# Altium PCB STM32F103UART3.PcbDoc
Units mm, origin at the board's own origin, x right, y up, seen from the top; angles counter-clockwise.
Board outline 80 x 50 mm, 2 copper layers (Top Layer, Bottom Layer); 37 components, 51 nets, 188 pads, 36 vias.
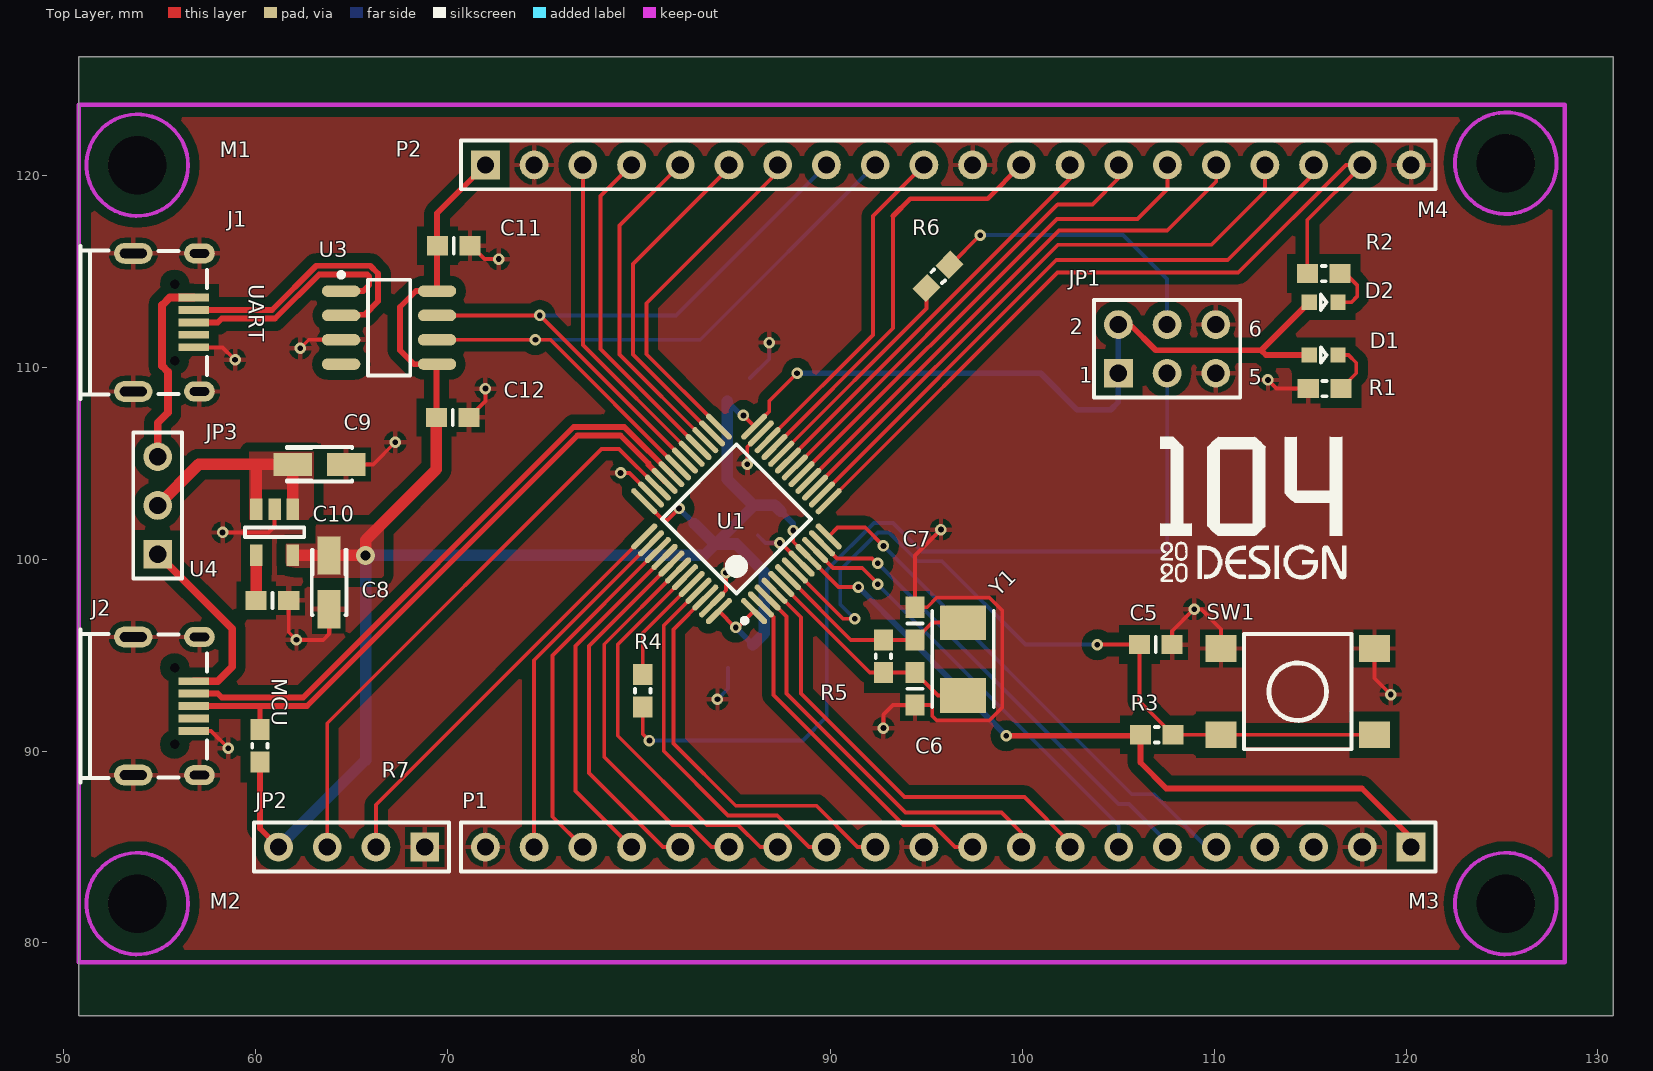
[diagram p0: Top Layer view]
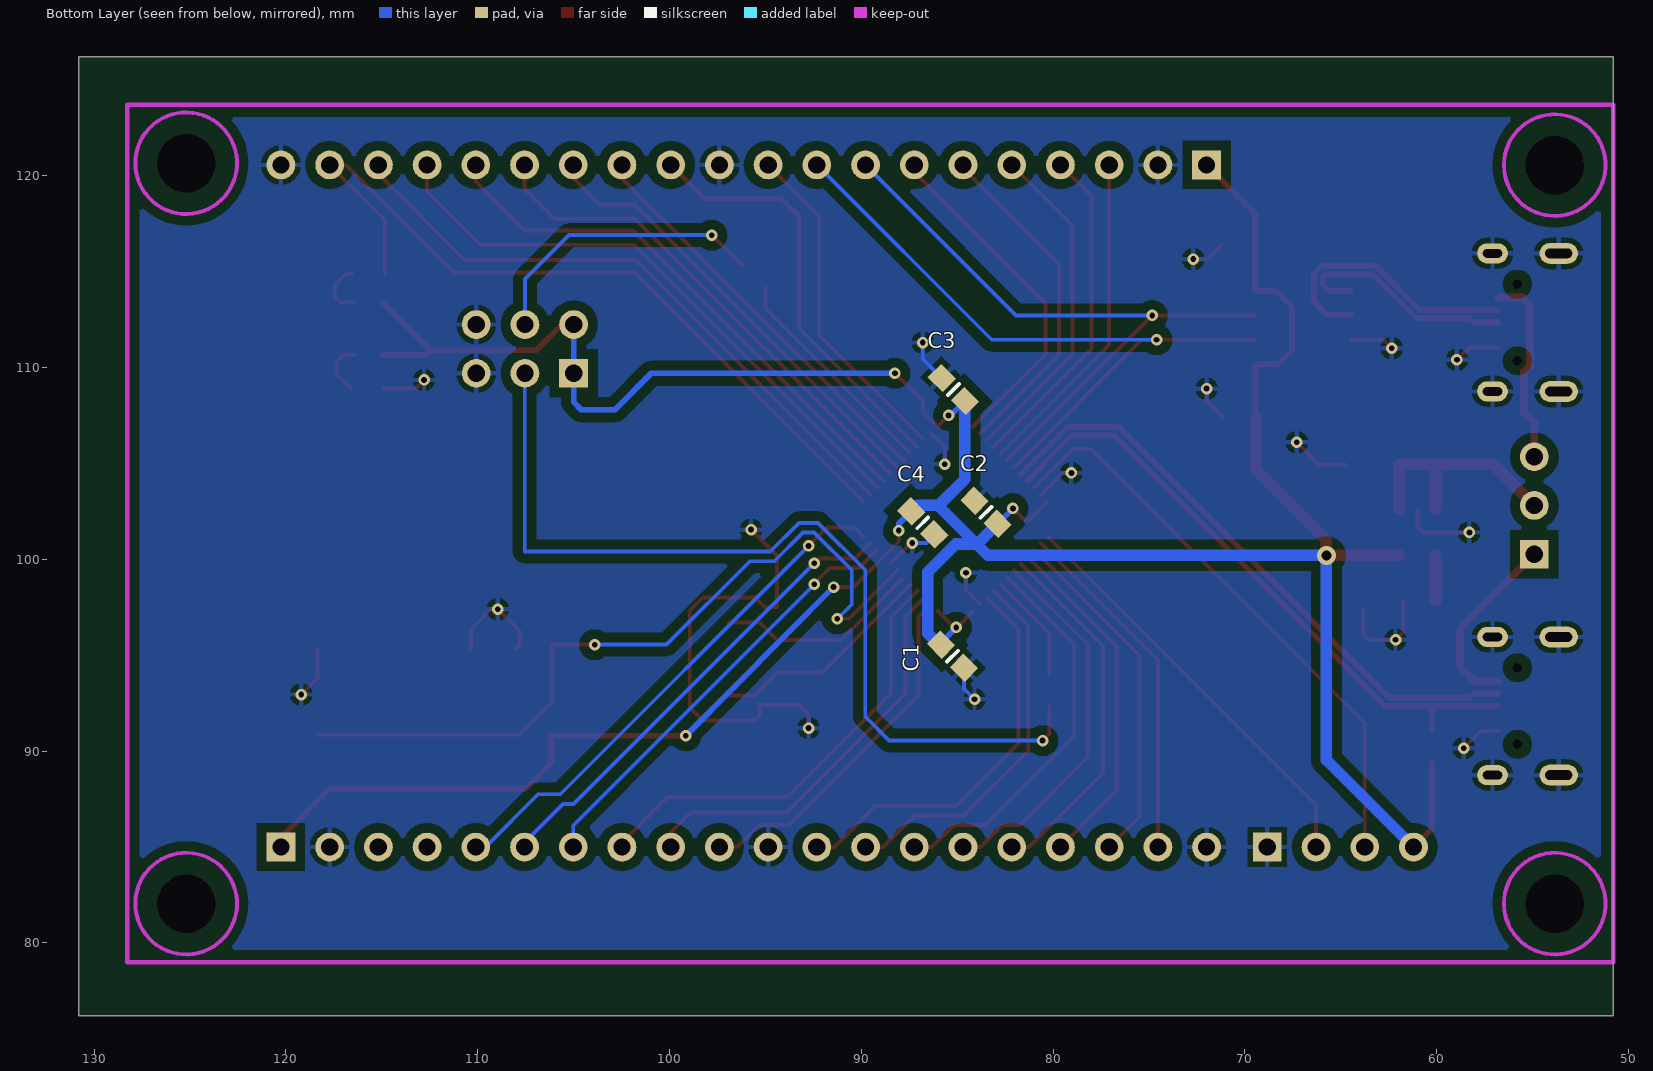
[diagram p1: Bottom Layer view, seen from below]

## Layer stack, top to bottom
Top Solder: solder mask 0.0102, Solder Resist, Dk 3.5
Top Layer: signal copper 0.0356
Dielectric 1: dielectric 0.32, FR-4, Dk 4.8
Bottom Layer: signal copper 0.0356
Bottom Solder: solder mask 0.0102, Solder Resist, Dk 3.5

## Board outline
50.8,76.2 130.8,76.2 130.8,126.2 50.8,126.2

## Design rules (kind name [scope] priority, off if disabled: settings)
Clearance DIFF_TRACK [IsTrack vs IsTrack and (InNet('D+') or InNet('D-') or InNet('USBDM') or InNet('USBDP'))] p1: gap=0.128
Clearance DIFF_POLY [InNet('GND') and InPolygon vs InNet('D+') or InNet('D-') or InNet('USBDM') or InNet('USBDP') or InNet('VCC') or InNet('USB5V') or InNet('USB5V_FT') or InNet('OSC_IN') or InNet('OSC_OUT') or InNet('VCC_BYP') or OnLayer('Keep-Out Layer')] p2 off: gap=0.5
Clearance PAD_PAD [IsPad vs IsPAD and (HasFootprint('USB_MICRO_B_U-F-M5DD-Y-1') or HasFootprint('MSOP-10') or HasFootprint('STM-LQFP48_N'))] p3: gap=0.2
Clearance PAD_VIA [IsVia vs IsPAD and NOT (HasFootprint('QFN28P'))] p4: gap=0.3
Clearance PAD_TRACK [IsTrack vs IsPAD and (HasFootprint('USB_MICRO_B_U-F-M5DD-Y-1') or HasFootprint('MSOP-10') or HasFootprint('STM-LQFP48_N'))] p5: gap=0.2
Clearance Track_Track [IsTrack vs IsTrack] p6: gap=0.3
Clearance [All] p7: gap=0.3 except(0.4: Poly-Text Poly-Region; 0.5: Poly-Poly SMDPad-Poly Track-Poly Via-Poly Arc-Poly Fill-Poly THPad-Poly)
HoleSize [All] p1: absolutevalues=TRUE maxlimit=3.302 minlimit=0.3 maxpercent=80.000 minpercent=20.000
MinimumSolderMaskSliver [All vs Not (Hasfootprint('SOT-23-5') or Hasfootprint('USB_MICRO_B_U-F-M5DD-Y-1'))] p1: minsoldermaskwidth=0.1
PolygonConnect PolygonPower [All vs NOT InNet('GND')] p1: connectstyle=Direct reliefconductorwidth=0.254 reliefentries=4 polygonreliefangle="90 Angle" airgapwidth=0.254
PolygonConnect [All] p2: connectstyle=Relief reliefconductorwidth=0.254 reliefentries=4 polygonreliefangle="90 Angle" airgapwidth=0.275
RoutingVias [All] p1: holewidth=0.3 width=0.6 viastyle="Through Hole" minholewidth=0.3 minwidth=0.6 maxholewidth=0.6 maxwidth=1.2
SilkToSilkClearance [All] p1: silktosilkclearance=0.1
SilkToSolderMaskClearance [IsPad vs Not IsTrack] p1: minsilkscreentomaskgap=0.075 clearancetoexposedcopper=TRUE
SolderMaskExpansion [All] p1: expansion=0.1
UnpouredPolygon [All] p1: allowunpoured=FALSE
Width [All] p1: maxlimit=1.5 minlimit=0.076 preferedwidth=0.2 minimp=50.000000 maximp=50.000000 favimp=50.000000
25 further rules are at their usual default settings.

## Components (designator, comment, footprint, x,y, rotation, side; value= is the part's Value field where it differs from the comment)
C1 "Cap Semi" C0603 85.25,94.95 r225 bottom
C2 "Cap Semi" C0603 83.5,102.45 r45 bottom
C3 "Cap Semi" C0603 85.2,108.85 r45 bottom
C4 "Cap Semi" C0603 86.8,101.9 r225 bottom
C5 "Cap Semi" C0603 106.95,95.55 r0 top
C6 "Cap Semi" C0603 94.4,93.25 r270 top
C7 "Cap Semi" C0603 94.4,96.65 r90 top
C8 "Cap Semi" C0603 60.9,97.85 r0 top
C9 "Cap Pol3" C_CASE_A 63.35,104.95 r0 top
C10 "Cap Pol3" C_CASE_A 63.85,98.8 r270 top
C11 "Cap Semi" C0603 70.35,116.35 r0 top
C12 "Cap Semi" C0603 70.3,107.4 r180 top
D1 "电源" LED0603 115.7,110.65 r0 top
D2 "测试" LED0603 115.7,113.4 r0 top
J1 "U-F-M5DD-Y-1" USB_MICRO_B_U-F-M5DD-Y-1 53.644,112.35 r90 top
J2 "U-F-M5DD-Y-1" USB_MICRO_B_U-F-M5DD-Y-1 53.644,92.35 r90 top
JP1 "BOOT" HDR2X3 105,109.7 r0 top
JP2 "SWD" HDR1X4 68.834,85 r180 top
JP3 "Header 3" HDR1X3 54.914,100.267 r90 top
M1 "MOUNT" MOUNT3 53.85,120.55 r0 top
M2 "MOUNT" MOUNT3 53.85,82.05 r0 top
M3 "MOUNT" MOUNT3 125.2,82.05 r0 top
M4 "MOUNT" MOUNT3 125.2,120.65 r0 top
P1 "Header 20" HDR1X20 120.26,85 r180 top
P2 "Header 20" HDR1X20 72,120.56 r0 top
R1 "Res Semi" R0603 115.75,108.9 r0 top
R2 "Res Semi" R0603 115.7,114.9 r0 top
R3 "Res Semi" R0603 107,90.85 r180 top
R4 "Res2" R0603 80.2,93.15 r90 top
R5 "Res3" R0603 92.75,94.95 r270 top
R6 "Res2" R0603 95.6,114.75 r225 top
R7 "Res3" R0603 60.248,90.273 r90 top
SW1 "B3FS" SW_B3FS 114.35,93.1 r180 top
U1 "STM32F103C8T6" STM-LQFP48_N 85.09,102.108 r135 top
U3 "CH340N" SOP8_N 66.979,112.078 r0 top
U4 "SPX3819M5-L-3-3" SOT-23-5 61.01,101.41 r270 top
Y1 "XTAL" OSC5032_2P_AD 96.9,94.8 r90 top

## Footprints (in the part's own frame and the unit in brackets; to place one, negate y for a bottom-side part, rotate by r counter-clockwise, add the part's x,y. Pads: shape width x height; smd on the part's side, far side on the other; paste and mask are expansions set on the pad)
C0603 [mm] "Chip Capacitor; Body 1.6 x 0.8 mm (LxW typ)"
  rect 1.1x1 smd: 1(-0.85,0) 2(0.85,0)
  silkscreen extent 0,-0.4 0,0.4
C_CASE_A [mm] "Capacitor, SM Tantalum; Body 3.2 x 1.6 mm (LxW typ)"
  rect 2x1.2 smd: 1(-1.4,0) 2(1.4,0)
  silkscreen extent -1.7,-0.9 1.7,0.9
HDR1X3 [mm] "Connector; Header; 3 Position"
  rect 1.5x1.5 hole 0.9: 1(0,0)
  round 1.5 hole 0.9: 2(2.54,0) 3(5.08,0)
  silkscreen extent -1.27,-1.27 6.35,1.27
HDR1X4 [mm] "Connector; Header; 4 Position"
  rect 1.5x1.5 hole 0.9: 1(0,0)
  round 1.5 hole 0.9: 2(2.54,0) 3(5.08,0) 4(7.62,0)
  silkscreen extent -1.27,-1.27 8.89,1.27
HDR1X20 [mm] "Connector; Header; 20 Position"
  rect 1.5x1.5 hole 0.9: 1(0,0)
  round 1.5 hole 0.9: 2(2.54,0) 3(5.08,0) 4(7.62,0) 5(10.16,0) 6(12.7,0) 7(15.24,0) 8(17.78,0) 9(20.32,0) 10(22.86,0) 11(25.4,0) 12(27.94,0) 13(30.48,0) 14(33.02,0) 15(35.56,0) 16(38.1,0) 17(40.64,0) 18(43.18,0) 19(45.72,0) 20(48.26,0)
  silkscreen extent -1.27,-1.27 49.53,1.27
HDR2X3 [mm] "Connector; Header; 3x2 Position"
  rect 1.5x1.5 hole 0.9: 1(0,0)
  round 1.5 hole 0.9: 2(0,2.54) 3(2.54,0) 4(2.54,2.54) 5(5.08,0) 6(5.08,2.54)
  silkscreen extent -1.27,-1.27 6.35,3.81
LED0603 [mm] "SM LED; Body 1.6 x 0.8 mm; 2 Flat Leads"
  rect 0.8x0.8 smd: 1(-0.75,0) 2(0.75,0)
  silkscreen extent -0.15,-0.4 0.15,0.4
MOUNT3 [mm] "Mount Hole, Hole size 3mm, Diameter 5.3mm"
  round 3 hole 3.05 unplated: MT(0,0)
  Keep-Out Layer circle w0.2: c0,0 r2.65
OSC5032_2P_AD [mm] "Hand Drawn, 2-Leads,Body 5x3.2mm, Pitch 3.8mm"
  rect 1.8x2.4 smd: 1(-1.9,0) 2(1.9,0)
  silkscreen extent -2.5,-1.6 2.5,1.6, body extent -2.5,-1.6 2.5,1.6, height 1.23
R0603 [mm] "Chip Resistor; Body 1.6 x 0.9 mm (LxW typ)"
  rect 1.1x1 smd: 1(-0.85,0) 2(0.85,0)
  silkscreen extent -0.1,-0.4 0.1,0.4
SOP8_N [mm] "SOIC, 8-Leads, Body 4.9x3.9mm, Pitch 1.27mm, IPC Medium Density"
  oval 2x0.6 smd: 1(-2.5,1.905) 2(-2.5,0.635) 3(-2.5,-0.635) 4(-2.5,-1.905) 5(2.5,-1.905) 6(2.5,-0.635) 7(2.5,0.635) 8(2.5,1.905)
  silkscreen extent -2.62,-2.5 1.1,2.88, body extent -2,-2.5 2,2.5, height 1.75
SOT-23-5 [mm] "SOT-23, 5-Leads, Body 2.9x1.6mm, Pitch 0.95mm, Lead Span 2.8mm, IPC Medium Density"
  rect 1.1x0.65 smd: 1(-1.2,0.95) 2(-1.2,0) 3(-1.2,-0.95) 4(1.2,-0.95) 5(1.2,0.95)
  silkscreen extent -0.25,-1.55 0.25,1.55, body extent -0.9,-1.55 0.9,1.55, height 1.45
STM-LQFP48_N [mm] "QFP, 48-Leads, Body 7x7mm, Pitch 0.5mm, IPC Medium Density"
  oval 1.8x0.3 smd: 1(-4.05,2.75) 2(-4.05,2.25) 3(-4.05,1.75) 4(-4.05,1.25) 5(-4.05,0.75) 6(-4.05,0.25) 7(-4.05,-0.25) 8(-4.05,-0.75) 9(-4.05,-1.25) 10(-4.05,-1.75) 11(-4.05,-2.25) 12(-4.05,-2.75) 25(4.05,-2.75) 26(4.05,-2.25) 27(4.05,-1.75) 28(4.05,-1.25) 29(4.05,-0.75) 30(4.05,-0.25) 31(4.05,0.25) 32(4.05,0.75) 33(4.05,1.25) 34(4.05,1.75) 35(4.05,2.25) 36(4.05,2.75)
  oval 0.3x1.8 smd: 13(-2.75,-4.05) 14(-2.25,-4.05) 15(-1.75,-4.05) 16(-1.25,-4.05) 17(-0.75,-4.05) 18(-0.25,-4.05) 19(0.25,-4.05) 20(0.75,-4.05) 21(1.25,-4.05) 22(1.75,-4.05) 23(2.25,-4.05) 24(2.75,-4.05) 37(2.75,4.05) 38(2.25,4.05) 39(1.75,4.05) 40(1.25,4.05) 41(0.75,4.05) 42(0.25,4.05) 43(-0.25,4.05) 44(-0.75,4.05) 45(-1.25,4.05) 46(-1.75,4.05) 47(-2.25,4.05) 48(-2.75,4.05)
  silkscreen extent -4.17,-2.75 2.75,3.57, body extent -3.5,-3.5 3.5,3.5, height 1.6
SW_B3FS [mm] "Surface Mount DTSM Tact Switch; Body 6 x 6 mm (LxW)"
  rect 1.6x1.4 smd: 1(4,-2.25) 2(-4,-2.25) 3(4,2.25) 4(-4,2.25)
  silkscreen extent -2.8,-3 2.8,3
USB_MICRO_B_U-F-M5DD-Y-1 [mm] "USB Connector; Body 7.45mm x 6.6mm; MICRO B"
  rect 0.4x1.6 smd: 1(1.3,-3.15) 2(0.65,-3.15) 3(0,-3.15) 4(-0.65,-3.15) 5(-1.3,-3.15)
  oval 1.05x1.6 hole 0.45 slot 1 at 90 deg: 6(3.6,-3.45) 7(-3.6,-3.45)
  oval 1.09x2 hole 0.5 slot 1.4 at 90 deg: 8(3.6,0) 9(-3.6,0)
  round 0.3 hole 0.5: 10(2,-2.15) 11(-2,-2.15)
  silkscreen extent -4,-3.85 4,2.75

## Part data
C1 C2 C3 C4 C5 C6 C7 C8 C11 C12: "Capacitor (Semiconductor SIM Model)"
C9 C10: "Polarized Capacitor (Surface Mount)"
D1 D2: library part LED2, "Typical RED, GREEN, YELLOW, AMBER GaAs LED"
J1 J2: library part USB_MICRO, "5-PIN USB SERIES MICRO-B REC"
JP1: library part "Header 3X2", "Header, 3-Pin, Dual row"
JP2: library part "Header 4", "Header, 4-Pin"
JP3: "Header, 3-Pin"
M1 M2 M3 M4: "Mount, Hole Size 3mm, Diameter 5.3"
P1 P2: "Header, 20-Pin"
R1 R2 R3: "Semiconductor Resistor"
R4 R5 R6 R7: library part "Res Semi", "Semiconductor Resistor"
SW1: "6x6 mm, SPNA SMD Keyboard Switch (TACT Switch)"
U1: "ARM Cortex-M3 32-bit MCU, 64 KB Flash, 20 KB Internal RAM, 37 I/Os, 48-pin LQFP, -40 to 85 degC, Tray"
U3: "USB to Serial Chip"
U4: library part SPX3819M5, "500mA, 16V Low-Noise LDO Voltage Regulator"
Y1: "Crystal Oscillator"

## Via types
v1: diameter 0.6, hole 0.3, Top Layer to Bottom Layer, 35 vias
v2: diameter 1, hole 0.5, Top Layer to Bottom Layer, 1 vias

## Nets (pads, with @x,y where several pads share a name; then routed paths per layer and width w, separated by ;. In a path a pad name is that pad's centre, name@x,y a point inside that pad or via, vN(x,y) a via of type N, cw(c..) or ccw(c..) an arc to the next point about the centre after c; other vN are vias at no path point)
BOOT0: JP1.3 R4.1 | length 48
  Top Layer w0.2: R4.1 80.2,90.9 v1(80.55,90.55)
  Bottom Layer w0.2: v1(80.55,90.55) 88.55,90.55 89.8,91.8 89.8,99.447 92.253,101.9 93.247,101.9 94.747,100.4 107.55,100.4 107.55,109.69 JP1.3
BOOT1: JP1.4 R6.1 | length 15.3
  Top Layer w0.2: R6.1 96.251,115.351 v1(97.8,116.9)
  Bottom Layer w0.2: v1(97.8,116.9) 105.25,116.9 107.54,114.61 JP1.4
D+: J1.3 U3.1 | length 12.3
  Top Layer w0.3: J1.3 58.05,112.35 58.25,112.55 61.033,112.55 63.333,114.85 65.845,114.85 65.949,114.745 65.949,114.299 65.633,113.983 U3.1
D-: J1.2 U3.2 | length 14.5
  Top Layer w0.3: J1.2 60.877,113 63.177,115.3 66,115.3 66.4,114.9 66.4,113.45 65.705,112.755 64.437,112.755 U3.2
GND: C1.2 C2.2 C3.2 C4.2 C5.2 C6.2 C7.2 C8.2 C9.2 C10.2 C11.2 C12.1 J1.5 J1.6 J1.7 J1.8 J1.9 J2.5 J2.6 J2.7 J2.8 J2.9 JP1.5 JP1.6 JP2.1 P1.2 P1.11 P1.20 P2.2 P2.11 P2.20 R1.1 SW1.1 SW1.2 U1.8 U1.23 U1.35 U1.47 U3.3 U4.2 | length 69
  Top Layer w0.2: J2.5 57.7,91.05 v1(58.6,90.15) ; J1.5 58.3,111.05 v1(58.95,110.4) ; v1(58.3,101.4) 60.7,101.4 61.01,101.71 U4.2 ; C8.2 61.75,96.2 v1(62.15,95.8) 63.55,95.8 63.85,96.1 C10.2 ; v1(62.35,111) 62.793,111.443 U3.3 ; C9.2 66.15,104.95 v1(67.3,106.1) ; C12.1 72,108.25 v1(72,108.9) ; C11.2@71.225,116.375 71.95,115.65 v1(72.7,115.65) ; v1(79.05,104.5) 79.516,104.5 U1.35 ; U1.47 84.55,98.386 v1(84.55,99.3) ; v1(85.65,104.95) 85.65,105.85 U1.23 ; v1(87.35,100.85) 87.409,100.85 U1.8 ; v1(92.75,91.2) 92.75,91.9 93.25,92.4 C6.2 95.3,92.4 95.3,91.834 95.534,91.6 98.266,91.6 98.95,92.284 98.95,97.316 98.266,98 95.534,98 95.034,97.5 C7.2 94.4,100.2 v1(95.75,101.55) ; C5.2@108,95.35 C5.2 107.8,96.25 v1(108.95,97.4) 109.3,97.4 110.35,96.35 SW1.1 ; v1(112.8,109.35) 113.25,108.9 R1.1 ; SW1.2 118.35,93.8 v1(119.2,92.95) v1@119.2,93.15
  Bottom Layer w0.2: v1(84.1,92.7) 84.649,93.249 C1.2 ; C3.2 86.8,110.45 v1(86.8,111.3) ; C4.2@86.199,101.251 86.6,100.85 v1(87.35,100.85)
NetC8_1: C8.1 U4.4 | length 2.4
  Top Layer w0.6: C8.1 60.06,97.86 U4.4
NetD1_2: D1.2 R1.2 | length 2.8
  Top Layer w0.2: D1.2 117,110.65 117.4,110.25 117.4,109.7 R1.2
NetD2_2: D2.2 R2.2 | length 2.9
  Top Layer w0.2: D2.2 117.15,113.4 117.45,113.7 117.45,114.3 116.85,114.9 R2.2
NetR4_2: R4.2 U1.44 | length 5.8
  Top Layer w0.2: R4.2 80.2,96.157 U1.44
NetR6_2: R6.2 U1.20 | length 11.8
  Top Layer w0.2: U1.20 94.999,113.078 R6.2
NRST: C5.1 R3.1 SW1.3 SW1.4 U1.7 | length 41.8
  Top Layer w0.2: U1.7 90.652,96.9 v1(91.25,96.9) ; v1(103.9,95.55) C5.1 106.1,92.6 R3.1 SW1.3 SW1.4
  Bottom Layer w0.2: v1(91.25,96.9) 90.5,97.65 90.5,99.44 92.46,101.4 93.04,101.4 94.54,99.9 95.8,99.9 100.15,95.55 v1(103.9,95.55)
PA0: P1.7 U1.10 | length 23.4
  Top Layer w0.2: U1.10 90.123,99.55 91.65,99.55 v1@92.427,98.773 ; P1.7 P1.7@105.02,85.53
  Bottom Layer w0.2: v1(92.45,98.7) 105.02,86.13 P1.7
PA1: P1.6 U1.11 | length 25.1
  Top Layer w0.2: U1.11 90.33,100.05 92.15,100.05 92.4,99.8 v1(92.45,99.8) ; P1.6 P1.6@107.56,85.34
  Bottom Layer w0.2: v1(92.45,99.8) 105,87.25 105.55,87.25 107.56,85.24 P1.6
PA2: P1.5 U1.12 | length 27.3
  Top Layer w0.2: U1.12 90.36,101.65 91.8,101.65 v1(92.75,100.7)
  Bottom Layer w0.2: v1(92.75,100.7) 105.7,87.75 106.85,87.75 109.6,85 P1.5
PA3: P2.19 R2.1 U1.13 | length 41.9
  Top Layer w0.2: U1.13 101.821,114.95 111.25,114.95 116.86,120.56 P2.19 114.85,117.69 R2.1
PA4: P2.18 U1.14 | length 33
  Top Layer w0.2: U1.14 101.764,115.6 110.7,115.6 115.18,120.08 P2.18
PA5: P2.17 U1.15 | length 31.2
  Top Layer w0.2: U1.15 101.857,116.4 109.85,116.4 112.64,119.19 P2.17
PA6: P2.16 U1.16 | length 29
  Top Layer w0.2: U1.16 101.9,117.15 107.55,117.15 110.1,119.7 P2.16 P2.16@109.66,120.56
PA7: P2.15 U1.17 | length 26.5
  Top Layer w0.2: U1.17 101.793,117.75 106,117.75 107.56,119.31 P2.15
PA8: P2.3 U1.29 | length 17.4
  Top Layer w0.2: P2.3 77.08,111.179 U1.29
PA9: P2.8 U1.30 U3.7 | length 34.2
  Top Layer w0.2: U3.7 v1(74.839,112.713) U1.30
  Bottom Layer w0.2: v1(74.839,112.713) 81.933,112.713 P2.8
PA10: P2.9 U1.31 U3.6 | length 36.8
  Top Layer w0.2: U3.6 v1(74.607,111.443) 75.401,111.443 U1.31
  Bottom Layer w0.2: v1(74.607,111.443) 83.203,111.443 P2.9
PA15: P1.19 U1.38 | length 18.4
  Top Layer w0.2: P1.19 74.54,94.74 U1.38
PB0: P2.14 U1.18 | length 23.8
  Top Layer w0.2: U1.18 101.836,118.5 103.65,118.5 105.02,119.87 P2.14
PB1: P2.13 U1.19 | length 21.5
  Top Layer w0.2: U1.19 102.48,119.852 P2.13
PB3: P1.18 U1.39 | length 18.4
  Top Layer w0.2: P1.18 75.5,86.58 75.5,94.993 U1.39
PB4: P1.17 U1.40 | length 18.3
  Top Layer w0.2: P1.17 76.7,87.92 76.7,95.486 U1.40
PB5: P1.16 U1.41 | length 19.1
  Top Layer w0.2: U1.41 77.4,95.479 77.4,88.85 81.25,85 P1.16
PB6: P1.15 U1.42 | length 19.8
  Top Layer w0.2: U1.42 78.2,95.572 78.2,89.7 81.75,86.15 82.636,86.15 83.786,85 P1.15
PB7: P1.14 U1.43 | length 20.5
  Top Layer w0.2: U1.43 78.9,95.564 78.9,90.8 83.55,86.15 85.176,86.15 86.326,85 P1.14
PB8: P1.13 U1.45 | length 19.7
  Top Layer w0.2: U1.45 81.3,96.55 81.3,90 84.65,86.65 87.216,86.65 88.866,85 P1.13
PB9: P1.12 U1.46 | length 21.1
  Top Layer w0.2: U1.46 81.8,96.343 81.8,90.4 85.05,87.15 89.256,87.15 91.406,85 P1.12
PB10: P2.12 U1.21 | length 22.4
  Top Layer w0.2: U1.21 87.07,105.863 93.25,112.043 93.25,117.9
  Top Layer w0.254: 93.25,117.9 94.15,118.8 98.18,118.8 P2.12
PB11: P2.10 U1.22 | length 17.7
  Top Layer w0.2: U1.22@86.825,106.325 92.2,111.7 92.2,117.9 P2.10 P2.10@94.77,120.65
PB12: P2.7 U1.25 | length 18
  Top Layer w0.2: U1.25 80.4,110.687 80.4,113.35 87.24,120.19 P2.7
PB13: P2.6 U1.26 | length 17.8
  Top Layer w0.2: U1.26 79.7,110.68 79.7,115.4 84.7,120.4 P2.6
PB14: P2.5 U1.27 | length 17.5
  Top Layer w0.2: P2.5 79,117.4 79,110.673 U1.27
PB15: P2.4 U1.28 | length 17.5
  Top Layer w0.2: P2.4 78,118.94 78,110.966 U1.28
PC13: P1.10 U1.2 | length 18.7
  Top Layer w0.2: U1.2 87.028,96.988 87.028,92.922 93.8,86.15 95.336,86.15 96.486,85 P1.10
PC14: P1.9 U1.3 | length 21.4
  Top Layer w0.2: U1.3 87.7,97.023 87.7,93 93.9,86.8 98.9,86.8 99.94,85.76 P1.9
PC15: P1.8 U1.4 | length 23.4
  Top Layer w0.2: U1.4 88.45,96.98 88.45,93 93.85,87.6 100.1,87.6 102.48,85.22 P1.8
SWCLK: JP2.2 U1.37 | length 22
  Top Layer w0.2: JP2.2 66.294,87.201 U1.37
SWDIO: JP2.3 U1.34 | length 30.4
  Top Layer w0.2: JP2.3 63.754,91.454 78.05,105.75 78.973,105.75 U1.34
USBDM: J2.2 U1.32 | length 31.8
  Top Layer w0.3: J2.2 58.05,93 58.25,92.8 62.5,92.8 76.6,106.9 78.049,106.9 79.237,106.9 79.394,106.744 U1.32
USBDP: J2.3 R7.2 U1.33 | length 32.6
  Top Layer w0.254: R7.2 60.248,92.348 60.25,92.35
  Top Layer w0.3: J2.3 62.7,92.35 76.8,106.45 79.05,106.45 80.5,105 80.5,104.93 U1.33
VCC: C1.1 C2.1 C3.1 C4.1 C10.1 C11.1 C12.2 D1.1 D2.1 JP1.1 JP1.2 JP2.4 P1.1 P2.1 R3.2 R7.1 U1.1 U1.9 U1.24 U1.36 U1.48 U3.5 U3.8 U4.5 | length 179.9
  Top Layer w0.2: U1.36 81.259,102.05 81.5,102.05 v1(82.1,102.65) ; U1.48 85.02,96.45 v1(85.05,96.45) 85.16,96.45 U1.1 ; v1(85.45,107.5) U1.24@85.983,106.967 ; U1.24 86.8,107.707 86.8,108.25 v1(88.25,109.7) ; v1(88.05,101.5) 88.05,100.916 90.416,98.55 v1(91.45,98.55) ; P1.1 P1.1@120.26,85.49
  Top Layer w0.3: R7.1 60.248,85.966 JP2.4 ; C12.2 69.45,110.144 U3.5 68.277,110.173 67.55,110.9 67.55,113.15 68.383,113.983 U3.8 69.479,118.039 P2.1 ; v1(99.15,90.8) 106.1,90.8 R3.2 106.15,89.4 107.5,88.05 117.7,88.05 P1.1@120.26,85.49 ; JP1.2 105.61,112.24 106.95,110.9 112.45,110.9 ; D1.1 112.7,110.65 112.45,110.9 ; D2.1 112.45,110.9
  Top Layer w0.6: U4.5 63.85,100.21 C10.1 v2(65.75,100.2) 65.75,101 69.45,104.7 C12.2
  Bottom Layer w0.3: v1(82.1,102.65) 82.899,101.851 C2.1 ; C3.1 85.348,107.5 v1(85.45,107.5) ; v1(85.05,96.45) 85.851,95.649 C1.1 ; C4.1 88.05,101.852 v1(88.05,101.5) ; v1(88.25,109.7) 100.95,109.7 102.85,107.8 104.6,107.8 105,108.2 JP1.1 JP1.2 ; v1(91.45,98.55) v1(99.15,90.8)
  Bottom Layer w0.6: JP2.4 65.75,89.536 v2(65.75,100.2) 83.4,100.2 85.975,102.775 ; C2.1 83.95,100.798 85.074,100.798 86.55,99.322 86.55,96.148 C1.1@85.951,95.549 ; C3.1 84.599,104.179 85.964,102.814 87.088,102.814 C4.1
VCC5V: C9.1 JP3.2 U4.1 U4.3 | length 12.7
  Top Layer w0.6: JP3.2 57.057,104.95 61.96,104.95 U4.1 ; U4.3 60.06,104.8 60.21,104.95
VCCIN: J2.1 JP3.1 | length 9.8
  Top Layer w0.4: JP3.1 58.8,96.381 58.8,94.4 58.05,93.65 J2.1
VDDIN: J1.1 JP3.3 | length 10.1
  Top Layer w0.4: JP3.3 54.914,107.114 55.45,107.65 55.45,109.775 55.144,110.081 55.144,113.256 55.538,113.65 J1.1
XTALA: C6.1 R5.2 U1.5 Y1.1 | length 11.9
  Top Layer w0.2: U1.5 92.037,94.1 R5.2 C6.1 ; C6.1 95.6,92.9 Y1.1
XTALB: C7.1 R5.1 U1.6 Y1.2 | length 10.7
  Top Layer w0.2: U1.6@87.848,98.997 91.044,95.8 R5.1 C7.1 95.3,96.7 Y1.2
pads on no net: J1.4 J1.10 J1.11 J2.4 J2.10 J2.11 M1.MT M2.MT M3.MT M4.MT P1.3 P1.4 U3.4

## Polygon pours and split planes (outlines as drawn)
GND on Top Layer "Bottom Layer-No Net" (solid, remove dead copper, pour order 8): 128.27,78.994 128.27,123.698 50.8,123.698 50.8,78.994
VCC on Top Layer "Bottom Layer-No Net" (solid, remove dead copper, pour order 3): 61.65,99.65 61.75,99.55 62.95,99.55 62.95,99.05 66.6,99.05 66.7,99.15 66.7,101.95 66.55,101.8 63.05,101.8 63.15,101.7 63.15,100.8 61.55,100.8 61.6,100.75 61.6,99.55 62.05,99.55
VCC5V on Top Layer "Bottom Layer-No Net" (solid, remove dead copper, pour order 4): 59.65,102.05 59.7,102.1 59.7,105.6 63.05,105.6 63.05,102.05 59.7,102.05
GND on Bottom Layer "Bottom Layer-No Net" (solid, remove dead copper, pour order 6): 128.27,123.698 128.27,78.994 50.8,78.994 50.8,123.698

## Keep-outs
Keep-Out Layer:
  lines w0.254: 50.8,78.994 50.8,123.698 128.27,123.698 128.27,78.994 50.8,78.994

## Silkscreen, mask and mechanical layers (free items; w line width, h text height)
Top Overlay:
  drawing of 1622 lines, arcs and shapes, not listed
  text "UART" at 59.67,114.344 h0.8 r270
  text "MCU" at 60.87,93.794 h0.8 r270

## Text inside footprints (layer, text, board x,y; h text height)
JP1: Top Overlay "1" at 102.968,109.192 h0.8; Top Overlay "2" at 102.46,111.732 h0.8; Top Overlay "5" at 111.8,109.1 h0.8; Top Overlay "6" at 111.8,111.6 h0.8